# Altium PCB PCBpower1.PcbDoc
Units mil, origin at the board's own origin, x right, y up, seen from the top; angles counter-clockwise.
Board outline 6000 x 4000 mil, 2 copper layers (Top Layer, Bottom Layer); 59 components, 24 nets, 142 pads, 27 vias.
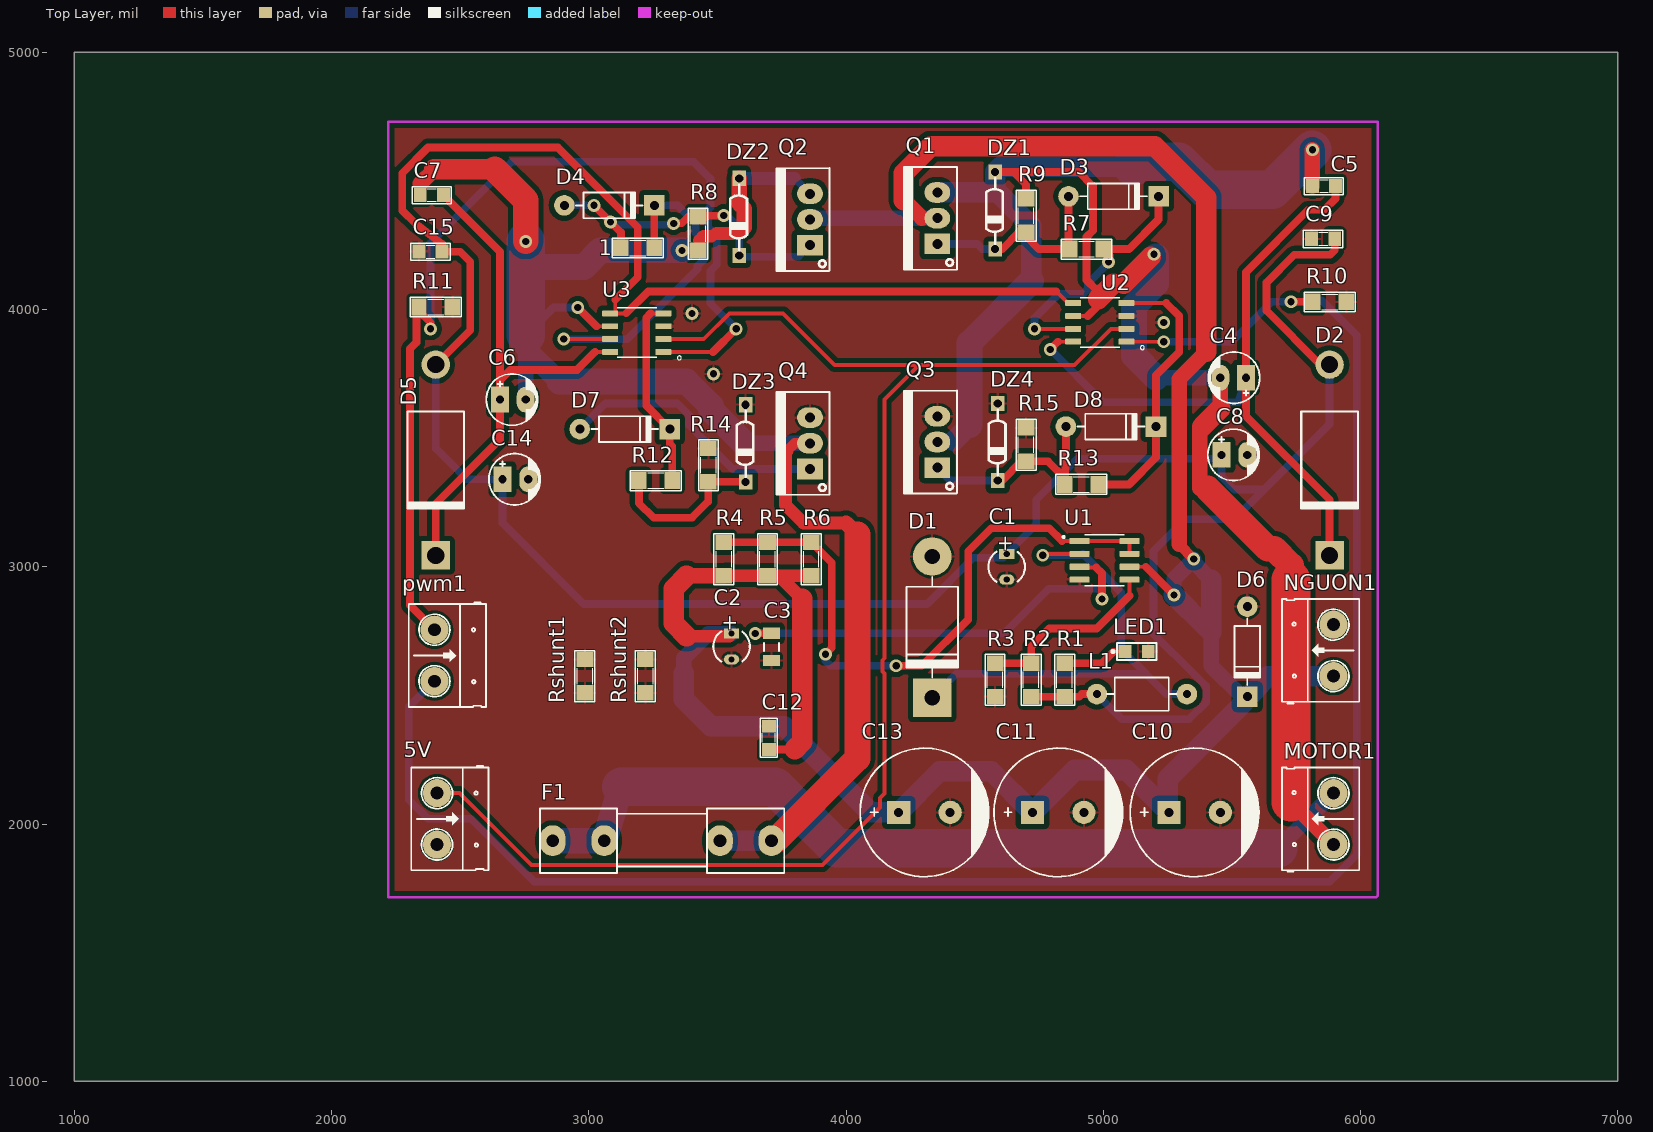
[diagram p0: Top Layer view]
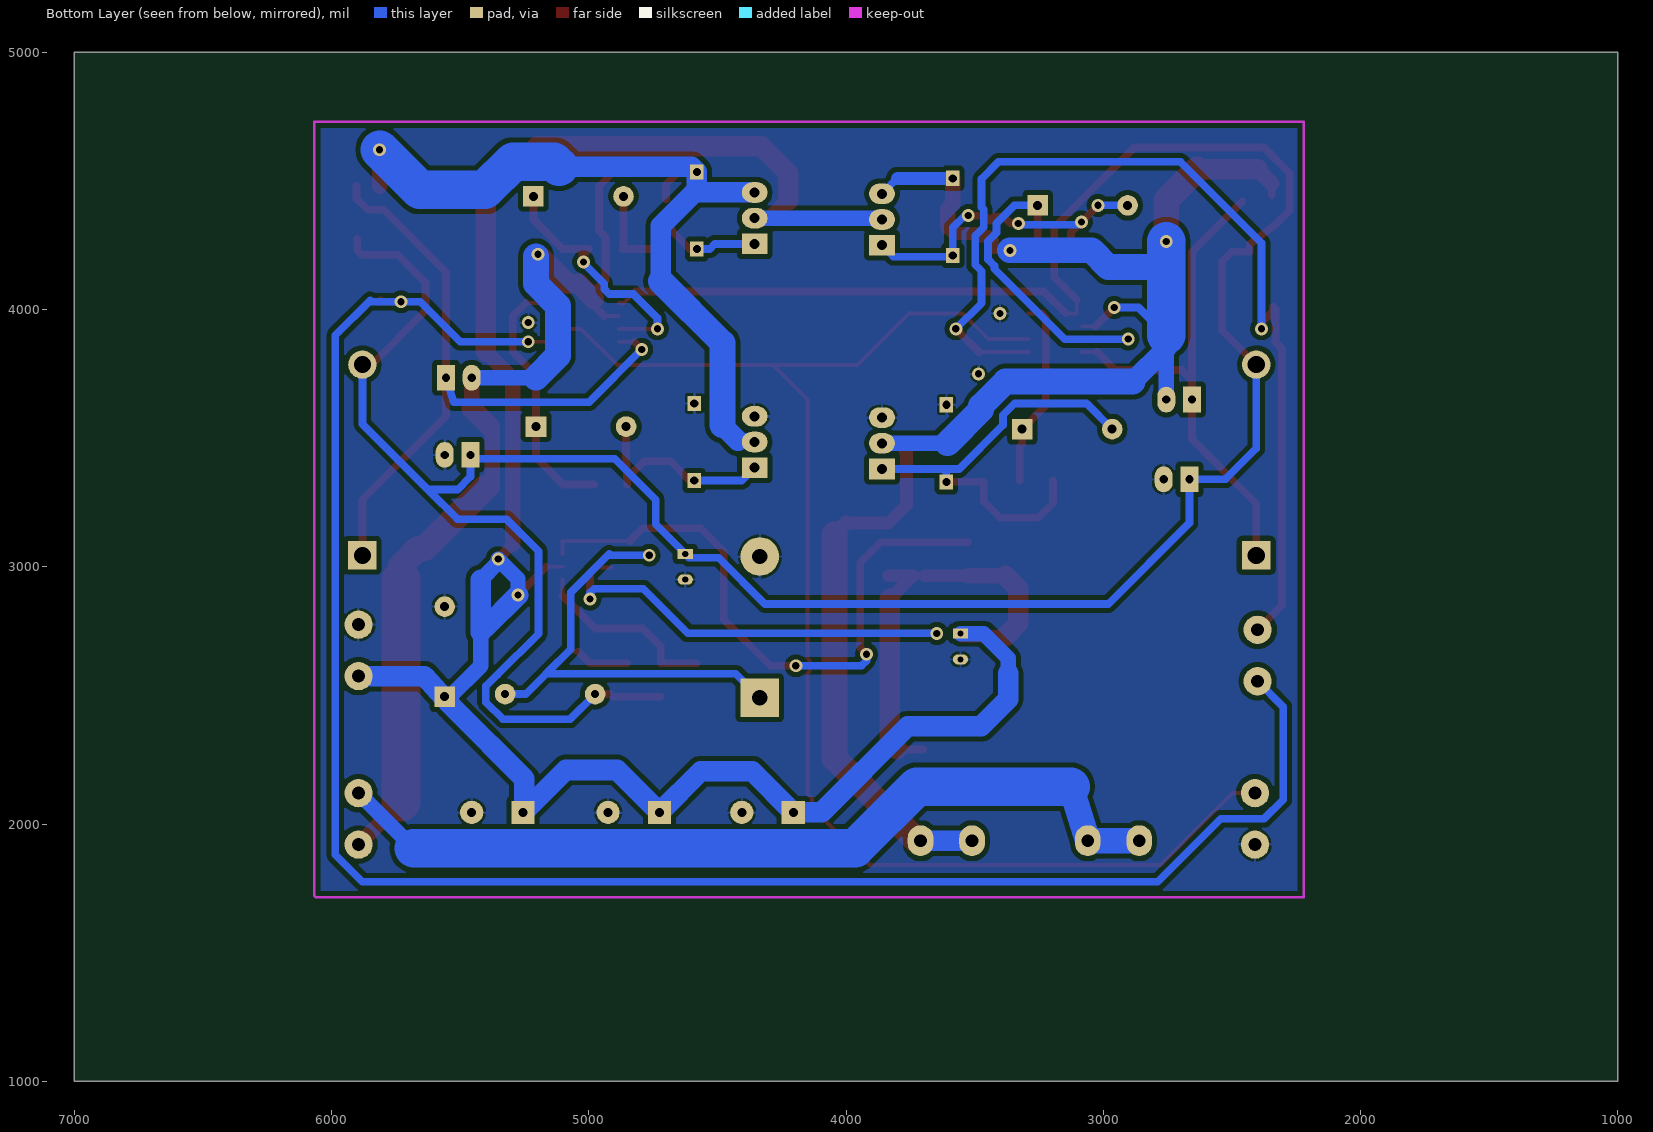
[diagram p1: Bottom Layer view, seen from below]
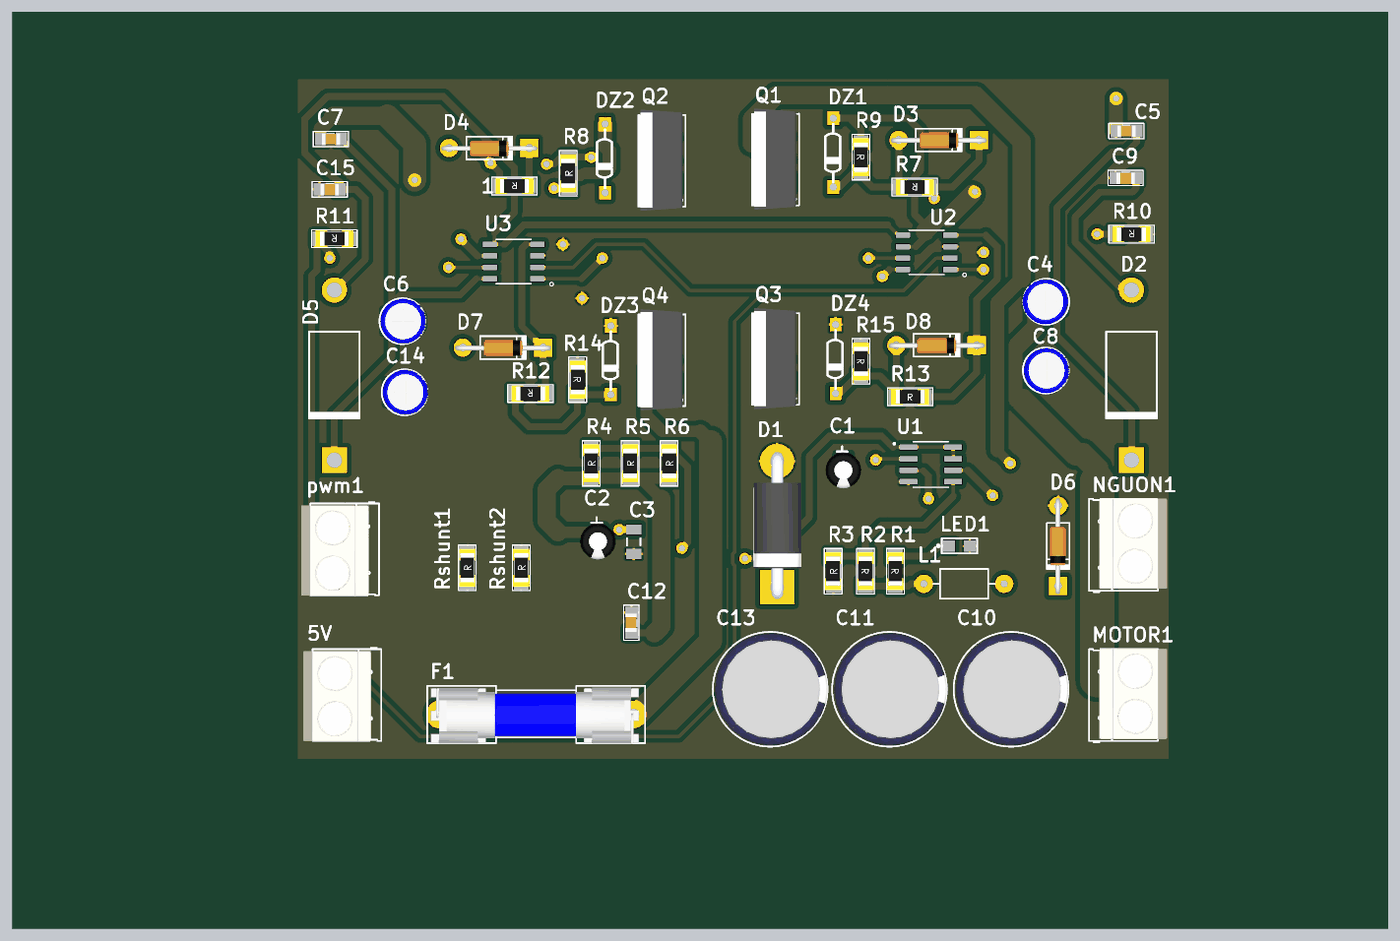
[diagram p2: 3D render of the assembled board from above, using the file's embedded part models]

## Layer stack, top to bottom
Top Solder: solder mask 0.4, Solder Resist, Dk 3.5
Top Layer: signal copper 1.4
Dielectric 1: dielectric 12.6, FR-4, Dk 4.8
Bottom Layer: signal copper 1.4
Bottom Solder: solder mask 0.4, Solder Resist, Dk 3.5

## Board outline
1000,1000 7000,1000 7000,5000 1000,5000

## Design rules (kind name [scope] priority, off if disabled: settings)
Clearance [All] p1: gap=20 ignorepadtopadclearanceinfootprint=FALSE
PolygonConnect [All] p1: connectstyle=Relief reliefconductorwidth=10 reliefentries=4 polygonreliefangle="90 Angle" airgapwidth=10
RoutingVias [All] p1: holewidth=28 width=50 viastyle="Through Hole" minholewidth=28 minwidth=50 maxholewidth=28 maxwidth=50
SilkToSolderMaskClearance [IsText] p1: minsilkscreentomaskgap=9.9 clearancetoexposedcopper=TRUE
SolderMaskExpansion [All] p1: expansion=4
Width [All] p1: maxlimit=200 minlimit=10 preferedwidth=30
29 further rules are at their usual default settings.

## Components (designator, comment, footprint, x,y, rotation, side; value= is the part's Value field where it differs from the comment)
1 "10R" SM-1206 3190,4240 r180 top value="R1/4W - 1K"
5V "Header 2" HED2 2410,2120 r270 top (schematic designator 2)
C1 "470uf" C3MM 4625,3000 r270 top
C2 "100uF" C3MM 3555,2690 r270 top
C3 "470p" C1206 3710,2688.15 r90 top
C4 "10uF" CP1/2 5555,3735 r180 top value=10uF/50V
C5 "104" SM-0805 5858,4480 r0 top value=103
C6 "10uF" CP1/2 2655,3650 r0 top value=10uF/50V
C7 "104" SM-0805 2390,4445 r0 top value=103
C8 "10uF" CP1/2 5460,3435 r0 top value=10uF/50V
C9 "104" SM-0805 5855,4275 r0 top value=103
C10 "Cap Pol3" CP2/5 5255,2045 r0 top value=220uF/35V
C11 "Cap Pol3" CP2/5 4725,2045 r0 top value=220uF/35V
C12 "104" SM-0805 3700,2335 r270 top value=103
C13 "Cap Pol3" CP2/5 4205,2045 r0 top value=220uF/35V
C14 "10uF" CP1/2 2665,3340 r0 top value=10uF/50V
C15 "104" SM-0805 2385,4225 r0 top value=103
D1 "1N5819" D5A 4335,2490 r90 top value=1N5408
D2 "Diode 1N5408" DO-201AD 5880,3415 r270 top
D3 "1N4148" D1A 4865,4440 r180 top value=1N4007
D4 "1N4148" D1A 2905,4405 r180 top value=1N4007
D5 "Diode 1N5408" DO-201AD 2405,3415 r270 top
D6 "1N4007" D1A 5560,2845 r90 top
D7 "1N4148" D1A 2965,3535 r180 top value=1N4007
D8 "1N4148" D1A 4855,3545 r180 top value=1N4007
DZ1 "Diode Zener" DIODE/NOM/0.5A 4580,4535 r270 top
DZ2 "Diode Zener" DIODE/NOM/0.5A 3585,4510 r270 top
DZ3 "Diode Zener" DIODE/NOM/0.5A 3610,3630 r270 top
DZ4 "Diode Zener" DIODE/NOM/0.5A 4590,3635 r270 top
F1 "F1A" Fuse 3285,1935 r180 top value=Fuse
L1 "220uH" L/0.4 5325,2505 r180 top value="150 mH"
LED1 "LED3" LED0805 5130,2670 r0 top
MOTOR1 "Header 2" HED2 5895,1920 r90 top
NGUON1 "Header 2" HED2 5895,2575 r90 top
pwm1 "Header 2" HED2 2400,2755 r270 top
Q1 "IRF540N" QTO-220 4355,4255 r90 top value=IRF840
Q2 "IRF540N" QTO-220 3860,4250 r90 top value=IRF840
Q3 "IRF540N" QTO-220 4355,3385 r90 top value=IRF840
Q4 "IRF540N" QTO-220 3860,3380 r90 top value=IRF840
R1 "2k7" SM-1206 4850,2560 r270 top value="R1/4W - 1K"
R2 "10k" SM-1206 4720,2560 r270 top value="R1/4W - 1K"
R3 "1k2" SM-1206 4580,2560 r90 top value="R1/4W - 1K"
R4 "1k" SM-1206 3525,3030 r90 top value="R1/4W - 1K"
R5 "1k" SM-1206 3695,3030 r90 top value="R1/4W - 1K"
R6 "1k" SM-1206 3865,3030 r90 top value="R1/4W - 1K"
R7 "10R" SM-1206 4935,4235 r180 top value="R1/4W - 1K"
R8 "4k7" SM-1206 3425,4295 r90 top value="R1/4W - 1K"
R9 "4k7" SM-1206 4700,4365 r270 top value="R1/4W - 1K"
R10 "10k" SM-1206 5880,4030 r180 top value="R1/4W - 1K"
R11 "10k" SM-1206 2405,4010 r180 top value="R1/4W - 1K"
R12 "10R" SM-1206 3260,3335 r180 top value="R1/4W - 1K"
R13 "10R" SM-1206 4915,3320 r0 top value="R1/4W - 1K"
R14 "4k7" SM-1206 3465,3395 r270 top value="R1/4W - 1K"
R15 "4k7" SM-1206 4700,3475 r270 top value="R1/4W - 1K"
Rshunt1 "0.1" SM-1206 2985,2575 r90 top value="R1/4W - 1K"
Rshunt2 "0.1" SM-1206 3220,2575 r90 top value="R1/4W - 1K"
U1 "MC34063AD" SOIC127P599X175-8N 5005,3025 r0 top
U2 "IR2184" SOIC127P490X600X175-8N 4986.65,3950 r180 top
U3 "IR2184" SOIC127P490X600X175-8N 3186.65,3910 r180 top

## Footprints (in the part's own frame and the unit in brackets; to place one, negate y for a bottom-side part, rotate by r counter-clockwise, add the part's x,y. Pads: shape width x height; smd on the part's side, far side on the other; paste and mask are expansions set on the pad)
C3MM [mm]
  rect 1x1.5 hole 0.6: 1(-1.27,0)
  oval 1x1.5 hole 0.6: 2(1.27,0)
  silkscreen extent -1.5,-1.81 1.5,1.8, body extent -2,-2.03 1.99,1.97, height 7.01
C1206 [mm] "Chip Capacitor, Body 3.2x1.6mm, IPC High Density"
  rect 1.1x1.7 smd: 1(-1.35,0) 2(1.35,0)
  silkscreen extent -0.4,-0.75 0.4,0.75, body extent -1.7,-0.9 1.7,0.9, height 1.3
CP1/2 [mil] "Tu hoa < 22uF/16>50V"
  rect 70x100 hole 32: 1(0,0)
  oval 70x100 hole 32: 2(100,0)
  silkscreen extent -53,-100 147,100, body extent -49,-99 149,99, height 287
CP2/5 [mil] "Tu hoa 1000uF/25V,50V"
  rect 90x90 hole 35: 1(0,0)
  round 90 hole 35: 2(200,0)
  silkscreen extent -150,-250 350,250, body extent -142,-246 350,246, height 984
D1A [mil] "Diode 1A, W 100mil, L 350mil"
  round 80 hole 35: 1(0,0)
  rect 80x80 hole 35: 2(-350,0)
  silkscreen extent -305,-50 -45,50, body extent -386,-33 34,36, height 84
D5A [mil] "Diode 5A, W 200mil, L 550mil"
  round 150 hole 60: 1(550,0)
  rect 150x150 hole 60: 2(0,0)
  silkscreen extent 80,-100 470,100, body extent -52,-106 590,103, height 254
DIODE/NOM/0.5A [mm]
  rect 1.5x1.3 hole 0.8: 1(0,0) 2(7.62,0)
  silkscreen extent 0.64,-0.89 7.11,0.76
DO-201AD [mm] "Diode, Axial; Body 9.5 x 5.6 mm (LxDia. max), Lead Dia. 1.32 mm (max)"
  round 2.8 hole 1.7: 1(-9.42,0)
  rect 2.8x2.8 hole 1.7: 2(9.42,0)
  silkscreen extent -4.8,-2.8 4.9,2.8
Fuse [mil] "De Fuse"
  oval 100x120 hole 50: 1(-425,0) 1(-225,0) 2(225,0) 2(425,0)
  silkscreen extent -475,-125 475,125, body extent -448,-117 459,127, height 378
HED2 [mil] "Header 2, 2 pin, hight 300mil, Pin to Pin 200, Colour Green"
  round 110 hole 50: 1(0,0) 2(200,0)
  silkscreen extent -106,-100 300,200, body extent -92,-140 302,155, height 394
L/0.4 [mil] "Inductor , 2 Pin, L 350mil, W 150 mil"
  round 80 hole 31: 1(0,0) 2(350,0)
  silkscreen extent 40,-65 310,65
LED0805 [mil] "Chip Resistor; Body 2.0 x 1.3 mm (LxW typ)"
  rect 50x50 smd: 1(-45,0) 2(45,0)
  silkscreen extent -97,-33 77,33, body extent -60,-25 60,25, height 47
QTO-220 [mil] "TO-220 - 1-2-3"
  rect 80x100 hole 39: 1(0,0)
  oval 80x100 hole 39: 2(100,0) 3(200,0)
  silkscreen extent -100,-76 300,130, body extent -119,-64 322,121, height 755
SM-0805 [mil] "Compoment SMD 80x50mil"
  rect 50x55 smd: 1(-45,0) 2(45,0)
  silkscreen extent -77,-34 76,33, body extent -40,-27 40,23, height 24
SM-1206 [mil] "Compoment SMD 120x60mil"
  rect 60x65 smd: 1(-65,0) 2(65,0)
  silkscreen extent -99,-38 99,39, body extent -83,-35 83,36, height 25
SOIC127P490X600X175-8N [mm]
  rrect25% 1.58x0.59 smd: 1(-2.625,1.905) 2(-2.625,0.635) 3(-2.625,-0.635) 4(-2.625,-1.905) 5(2.625,-1.905) 6(2.625,-0.635) 7(2.625,0.635) 8(2.625,1.905)
  silkscreen extent -4.41,-2.45 1.95,2.69
SOIC127P599X175-8N [mm]
  rrect25% 1.97x0.6 smd: 1(-2.47,1.905) 2(-2.47,0.635) 3(-2.47,-0.635) 4(-2.47,-1.905) 5(2.47,-1.905) 6(2.47,-0.635) 7(2.47,0.635) 8(2.47,1.905)
  silkscreen extent -4.14,-2.53 1.95,2.53

## Part data
1 R1 R2 R3 R4 R5 R6 R7 R8 R9 R10 R11 R12 R13 R14 R15 Rshunt1 Rshunt2: library part R, "Resistor 1/4W"
5V MOTOR1 NGUON1 pwm1: library part Hed2, "Header 2 (Green)"
C1 C2: library part "Cap Pol 3mm", "Polarized Capacitor (Axial)", LatestRevisionDate=17-Jul-2002, LatestRevisionNote="Re-released for DXP Platform.", PackageReference=POLAR0.8, Published=8-Jun-2000, Publisher="Altium Limited"
C3: library part "Cap SMD 1206"
C4 C6 C8 C14: library part CP1, "Cap P  0,1uF < 22uF , 16 - 50V", Description 1="10 => 220uF/6,3V/10V - 10uF => 100uF/16V", Description 2="0,1uF => 33uF/50V - 10uF => 22uF/63V", Description 3="0,47uF => 10uF/100V"
C5 C7 C9 C12 C15: library part CM, "Cap SMD"
C10 C11 C13: "Polarized Capacitor (Surface Mount)", LatestRevisionDate=17-Jul-2002, LatestRevisionNote="Re-released for DXP Platform.", PackageReference=C0805, Publisher="Altium Limited"
D1: library part D5A, "Diode 5A"
D2 D5: "3 Amp Medium Power Silicon Rectifier Diode", ComponentLink1Description="Manufacturer Link", ComponentLink1URL=http://www.irf.com/, DatasheetVersion=Aug-1984, LatestRevisionDate=17-Jul-2002, LatestRevisionNote="Re-released for DXP Platform.", PackageDescription="Diode, Axial; Body 9.5 x 5.3 mm (LxDia. max), Lead Dia. 1.32 mm (max)", PackageReference=DO-201AD, Published=8-Jun-2000, Publisher="Altium Limited"
D3 D4 D6 D7 D8: library part D1A, "Diode 1A"
DZ1 DZ2 DZ3 DZ4: "Zener Diode", LatestRevisionDate=17-Jul-2002, LatestRevisionNote="Re-released for DXP Platform.", PackageReference=DIODE-0.7, Published=8-Jun-2000, Publisher="Altium Limited"
F1: library part Fuse, "Fuse", Designed by=VanDungEvn
L1: library part L1, "Inductor"
LED1: library part LEDSMD, "LED 3mm"
Q1 Q2 Q3 Q4: library part IRF840, "MOSFET N - CHANNEL 500V - 0.75 - 8A - TO-220"
U1: "Buck, Boost Switching Regulator IC Positive or Negative Adjustable 1.25V 1 Output 1.5A (Switch) 8-SOIC (0.154, 3.90mm Width)", Package="SOIC-8 ON Semiconductor", Availability=Unavailable, DigiKey-Purchase-URL=https://snapeda.com/shop?store=DigiKey&id=653486, MF="ON Semiconductor", Mouser-Purchase-URL=https://snapeda.com/shop?store=Mouser&id=653486, MP=MC34063AD, Price=None, SnapEDA_Link=https://www.snapeda.com/parts/MC34063AD/ON%20Semiconductor/view-part/653486/?ref=snap
U2 U3: "Half-Bridge Driver"

## Via types
v1: diameter 50, hole 28, Top Layer to Bottom Layer, 27 vias

## Nets (pads, with @x,y where several pads share a name; then routed paths per layer and width w, separated by ;. In a path a pad name is that pad's centre, name@x,y a point inside that pad or via, vN(x,y) a via of type N, cw(c..) or ccw(c..) an arc to the next point about the centre after c; other vN are vias at no path point)
5V: 5V.1 U2.2 U3.2 | length 5703
  Top Layer w15: 5V.1 2497.48,2120 2777.48,1840 3908,1840 4132.5,2064.5 4132.5,2101.39 4150,2118.89 4150,2585.75 4142.5,2593.25 4142.5,2636.75 4150,2644.25 4150,3650 4284,3784 ; U3.2 3447,3885 3547,3985 3755,3985 3956,3784 4284,3784 ; U2.2 5030,3925 4889,3784 4284,3784
24V: C2.1 C10.1 C11.1 C12.2 C13.1 D6.2 NGUON1.1 Q1.2 Q2.2 R4.1 R5.1 R6.1 U1.6 | length 10102.9
  Top Layer w15: U1.6 5165,3000
  Top Layer w30: R5.1 3740,2965 ; C12.2 3800,2290 ; 5165,3000 v1(5275,2890)
  Top Layer w40: 4295,4355 Q1.2 ; 5295,3087 v1(5352,3030)
  Top Layer w50: 3380,2730 C2.1@3545,2730 ; R4.1 R5.1 ; 3830,2875 3740,2965 R6.1@3835,2965
  Top Layer w60: 3380,2965 R4.1 ; 4225,4425 4295,4355 ; 5295,3087 5295,3730 5401,3836
  Top Layer w80: 3380,2730 3330,2780 3330,2915 3380,2965 ; 3800,2290 3830,2320 3830,2875 ; 4225,4425 4225,4530 4330,4635 5200,4635 5401,4434 5401,3836
  Bottom Layer w30: Q2.2 Q2.2@3865,4355 ; C10.1@5250,2050 C10.1 ; 5525,2450 D6.2@5534.77,2460.62 ; D6.2@5540,2495 D6.2
  Bottom Layer w60: 3370,2585 3370,2645 3465,2740 C2.1 ; Q2.2@3865,4355 Q1.2 ; v1(5275,2890) 5275,2953 v1(5352,3030) ; v1@5352,3017 5420,2949 ; 5420,2745 5420,2615 D6.2@5540,2495
  Bottom Layer w80: 3370,2585 3370,2485 3475,2380 3760,2380 4095,2045 C13.1 4365,2205 4565,2205 C11.1 4890,2210 5090,2210 5250,2050 5250,2175 5525,2450 ; v1(5275,2890) 5400,2765 ; 5420,2745 5420,2949 ; D6.2@5534.77,2460.62 5563.47,2491.81 5640,2575 NGUON1.1
+12V: C1.1 C8.1 C9.2 C14.1 C15.2 D2.1 D5.1 L1.2 R1.2 R2.2 U2.5 U3.5 | length 11888.9
  Top Layer w15: 3103,4038 3103,3985 3146,3985 ; 4817.6,4070 4862.6,4025 U2.5
  Top Layer w30: D5.1 2539,3919.87 2539,4186 2500,4225 C15.2 2430,4255 2325,4335 2275,4385 2275,4530 2375,4630 2880,4630 3190,4320 3190,4125 3103,4038 ; 3146,3985 3231,4070 4817.6,4070 ; R2.2 R1.2 4907,2495 4917,2505 L1.2 ; D2.1 5844.13,3785.87 5635,3995 5635,4105 5742.5,4212.5 5882.5,4212.5 5900,4230 C9.2
  Bottom Layer w30: D5.1 2405,3460 2525,3340 C14.1 2665,3170 2980,2855 4315,2855 4495,3035 4610,3035 C1.1 4740,3165 4740,3261 4899,3420 C8.1@5460,3420 ; L1.2 5073,2407 5333.07,2407 5400,2473.93 5400,2536.07 5356.07,2580 5355,2580 5195,2740 5195,3060 5320,3185 5510,3185 5625,3300 ; C8.1 C8.1@5460,3420 ; D2.1 5880,3555 5625,3300 ; C8.1@5460,3420 5460,3350 5510,3300 5625,3300
GND: 5V.2 C1.2 C2.2 C3.1 C8.2 C9.1 C10.2 C11.2 C12.1 C13.2 C14.2 C15.1 D1.1 D6.1 DZ3.1 DZ4.1 LED1.2 NGUON1.2 Q3.3 Q4.3 R3.1 R10.1 R11.1 R14.1 R15.1 Rshunt1.1 Rshunt1.2 Rshunt2.1 Rshunt2.2 U1.4 U2.3 U3.3 | length 10
  Top Layer w30: C10.2 C10.2@5465,2045
  other v1: 3485,3750 5235,3950 3401,3985
M+: C4.2 C5.1 DZ1.1 MOTOR1.1 Q1.3 Q3.2 R9.1 U2.6 | length 7332.7
  Top Layer w15: U2.6 4940,3975
  Top Layer w30: DZ1.1 4650,4535 ; R9.1 4700,4485 4650,4535 ; 4940,3975 4980,4015 4980,4040 ; 4975,4075 4935,4115 4935,4282 4960,4307 4960,4480 4905,4535 4650,4535 ; v1@5185,4205 5195,4215 v1(5197.5,4215) ; 5375,3305 5405,3305 ; 5730,2950 5730,3005
  Top Layer w60: 5040,4100 5080,4100 ; 5375,3305 5375,3535 5385,3545 ; 5455,3615 C4.2 ; 5730,2085 MOTOR1.1 ; C5.1 v1(5813,4621)
  Top Layer w80: 4980,4040 4980,4040.87 5039.13,4100 5040,4100 ; 5080,4100 v1@5185,4205 ; 5385,3545 5455,3615
  Top Layer w100: 5405,3305 5640,3070 5665,3070 5730,3005
  Top Layer w150: 5730,2085 5730,2950
  Bottom Layer w30: Q3.2 4355,3505 Q3.2@4370,3490 ; v1(5197.5,4215) v1@5205,4207.5
  Bottom Layer w60: Q3.2@4370,3490 4420,3490 ; 5205,3735 C4.2
  Bottom Layer w80: Q1.3 4580,4456 ; 4420,3490 4480,3550 ; 4720,4110 4720,4325 4580,4465 DZ1.1 4600,4555 5115,4555
  Bottom Layer w100: 4480,3550 4480,3870 4720,4110 ; 5205,3735 5120,3820 5120,4015 5205,4100 v1@5205,4207.5
  Bottom Layer w150: 5115,4555 5115.65,4555 5135.65,4575 5294.35,4575 5404.35,4465 5657,4465 v1(5813,4621)
M-: F1.2 MOTOR1.2 | length 3377.4
  Bottom Layer w60: 5680,1905 MOTOR1.2
  Bottom Layer w100: F1.2@2860,1935 3060,1935 3126.32,2145
  Bottom Layer w150: 3126.32,2145 3725,2145 3965,1905 5680,1905
Net1_1: 1.1 D4.2 U3.7 | length 1368.3
  Top Layer w15: v1(2903,3885) U3.7
  Top Layer w30: 1.1 D4.2
  Bottom Layer w30: v1(2903,3885) 3150,3885 3423,4158 3423,4169.79 3448,4194.79 3448,4265.21 3415,4298.21 3415,4334.85 3344.85,4405 D4.2
Net1_2: 1.2 D4.1 DZ2.2 Q2.1 R8.2 | length 1282.4
  Top Layer w30: v1(3020,4405) v1(3085,4340) 3125,4300 1.2 ; v1(3330,4335) 3361,4335 3386,4360 R8.2 3440,4345 3460,4365 v1(3525,4365)
  Bottom Layer w30: D4.1 v1(3020,4405) ; v1(3085,4340) 3085,4338 3093,4330 3325,4330 v1(3330,4335) ; v1(3525,4365) 3539,4365 3585,4319 DZ2.2 3585,4205 3815,4205 Q2.1
NetC3_2: C3.2 U1.3 | length 1706.9
  Top Layer w15: U1.3@4910.94,2996.81 4973.19,2996.81
  Top Layer w30: v1(3647,2741) 3647.3,2741.3 C3.2 ; 4973.19,2996.81 4995,2975 v1(4995,2875)
  Bottom Layer w30: v1(3647,2741) 4614.85,2741 4788.85,2915 4979,2915 4995,2899 v1(4995,2875)
NetC4_1: C4.1 C5.2 D2.2 U2.8 | length 2768.3
  Top Layer w15: 4823.92,3875 U2.8
  Top Layer w30: v1(4793.96,3845.04) 4823.92,3875 ; D2.2 5880,3260 5555,3585 C4.1 5555,4145 5797.5,4387.5 5859.5,4387.5 5903,4431 C5.2
  Bottom Layer w30: v1(4793.96,3845.04) 4999,3640 5525,3640 C4.1
NetC6_1: C6.1 C7.2 D5.2 U3.8 | length 2034.1
  Top Layer w15: 3023.92,3835 U3.8
  Top Layer w30: D5.2 2405,3245 2655,3495 C6.1 2655,3725 ; 2460,4420 2655,4225 2655,3725 ; 3023.92,3835 2953.92,3765 2695,3765 2655,3725
NetC6_2: C6.2 C7.1 DZ2.1 F1.1 Q2.3 Q4.2 R8.1 U3.6 | length 6573.5
  Top Layer w15: 3030,3935 U3.6
  Top Layer w30: C7.1 2345,4490 ; v1(2957,4008) 3030,3935 ; v1(3363,4230) R8.1 3425,4250 3430,4255 3430,4267.79 ; 3585,4300 3604,4319 ; F1.1@3710,1935 F1.1@3725,1935
  Top Layer w40: 3770,3450 3800,3480 Q4.2
  Top Layer w50: 3430,4267.79 3447.21,4285 3476.14,4285 ; 3496.01,4295 3580,4295 3585,4300 ; 3770,3450 3765,3445 3765,3240 3835,3170 4000,3170
  Top Layer w60: 2345,4490 2400,4545 ; DZ2.1 3585,4411.07 3604,4392.07 3604,4319 ; 4000,3170 4045,3125
  Top Layer w80: 2400,4545 2635,4545
  Top Layer w100: 2635,4545 2755,4425 v1(2755,4265) ; F1.1@3725,1935 4045,2255 4045,3125
  Bottom Layer w30: 2755,3850 2755,3900 2863,4008 v1(2957,4008) ; 3800,4510 Q2.3
  Bottom Layer w50: DZ2.1 3800,4510
  Bottom Layer w60: C6.2 2755,3850 ; 3605,3480 Q4.2
  Bottom Layer w80: 2755,3850 2885,3720 ; F1.1@3510,1935 F1.1@3710,1935
  Bottom Layer w100: 2755,4130 2790,4165 2980,4165 3045,4230 v1(3363,4230) ; 2885,3720 3379.71,3720 3475,3624.71 3475,3610 3605,3480
  Bottom Layer w150: 2755,3900 2755,4130 v1(2755,4265)
NetD1_2: D1.2 L1.1 U1.2 | length 1924.5
  Top Layer w15: v1@4770,3050 U1.2
  Top Layer w30: v1(4765,3045) v1@4770,3050
  Bottom Layer w30: D1.2 4429,2584 5159,2584 5162.5,2587.5 5070,2680 5070,2900 4920,3050 4915,3045 v1(4765,3045) ; 5166,2584 5245,2505 L1.1
NetD3_1: D3.1 DZ1.2 Q1.1 R7.2 R9.2 | length 771.4
  Top Layer w30: DZ1.2 4607,4235 4672,4300 R9.2@4673.48,4306.27 ; R9.2 4700,4285 4750,4235 R7.2 4865,4240 D3.1
  Bottom Layer w30: Q1.1 4510,4255 4530,4235 DZ1.2
NetD3_2: D3.2 R7.1 U2.7 | length 999.3
  Top Layer w15: v1(4733,3925) U2.7
  Top Layer w30: v1(5020,4185) 5020,4205 5025,4210 R7.1 5100,4235 5215,4350 D3.2
  Bottom Layer w30: v1(4733,3925) 4733,3966.93 4826.07,4060 4920,4060 4940,4080 4940,4099.85 5020,4179.85 v1(5020,4185)
NetD7_1: D7.1 DZ3.2 Q4.1 R12.2 R14.2 | length 1744.1
  Top Layer w30: R12.2 3195,3247.5 3252.5,3190 3401,3190 3465,3254 R14.2 DZ3.2
  Bottom Layer w30: D7.1 3065,3635 3344.5,3635 3390,3589.5 3390,3549.79 3559.79,3380 3610,3380 ; DZ3.2 3610,3380 ; Q4.1 3610,3380
NetD7_2: D7.2 R12.1 U3.4 | length 749.3
  Top Layer w15: 3240,3985 U3.4
  Top Layer w30: 3240,3985 3223,3968 3223,3627 D7.2 3315,3477.5 3325,3467.5 R12.1
NetD8_1: D8.1 DZ4.2 Q3.1 R13.1 R15.2 | length 823.8
  Top Layer w30: DZ4.2 4607,3335 4682,3410 R15.2 4785,3410 4850,3345 R13.1 4855,3437 D8.1
  Bottom Layer w30: Q3.1 4405,3335 DZ4.2
NetD8_2: D8.2 R13.2 U2.4 | length 1081.4
  Top Layer w15: U2.4 5244.85,4025
  Top Layer w30: R13.2 5100,3320 5205,3425 D8.2 5205,3745 5295,3835 5295,3974.85 5244.85,4025
NetLED1_1: LED1.1 R1.1 | length 253.6
  Top Layer w15: 5040,2670 LED1.1
  Top Layer w30: R1.1 4995,2625 5040,2670
NetR2_1: R2.1 R3.2 U1.5 | length 731.7
  Top Layer w15: 5102.24,2887.24 U1.5
  Top Layer w30: R3.2 R2.1 4720,2690 4790,2760 4975,2760 5102.24,2887.24
NetR4_2: R4.2 R5.2 R6.2 U1.1 U1.7 U1.8 | length 2481.6
  Top Layer w15: 4840,3100 U1.1 U1.8 U1.7
  Top Layer w30: R4.2 R5.2 R6.2 3945,3015 3945,2685 v1(3920,2660) ; v1(4195,2615) 4295,2615 4475,2795 4475,3060 4565,3150 4790,3150 4840,3100
  Bottom Layer w30: v1(3920,2660) 3920,2635 3940,2615 v1(4195,2615)
pwm1: pwm1.1 R11.2 U3.1 | length 3964.3
  Top Layer w15: U3.1 3483,3835
  Top Layer w30: v1(2385,3925) 2385,3948 2340,3993 R11.2 2330,4000 2330,3872 2305,3847 2305,2850 pwm1.1 ; 3483,3835 v1(3573,3925)
  Bottom Layer w30: v1(2385,3925) 2385,4259 2700,4574 3407,4574 3473,4508 3473,4397.85 3465,4389.85 3465,4320.15 3498,4287.15 3498,4174.08 3473,4149.08 3473,4025 v1(3573,3925)
pwm2: pwm1.2 R10.2 U2.1 | length 7488.8
  Top Layer w15: U2.1 v1(5235,3875)
  Top Layer w30: v1(5730,4030) 5805,4030 5810,4035 R10.2
  Bottom Layer w30: pwm1.2 2300,2455 2300,2095 2375,2020 2543,2020 2788,1775 5880,1775 5985,1880 5985,3900 5850,4035 5845,4030 v1(5730,4030) 5655,4030 5500,3875 v1(5235,3875)

## Polygon pours and split planes (outlines as drawn)
GND on Top Layer "Bottom Layer-No Net" (solid, pour order 18): 2220,4730 6052.5,4730 6067.5,4715 6067.5,1735 2230,1735 2220,1725
GND on Bottom Layer "Bottom Layer-No Net" (solid, pour order 20): 2220,4730 6047.5,4730 6067.5,4710 6060,4702.5 6060,1715 2240,1715 2220,1735

## Keep-outs
Keep-Out Layer:
  lines w10: 2220,1715 6060,1715 6067.5,1722.5 6067.5,4730 5990,4730 2225,4730 2220,4730 2220,4725 2220,1725 2220,1715

## Text inside footprints (layer, text, board x,y; h text height)
C1: Top Overlay "+" at 4595,3125 h60 r270
C2: Top Overlay "+" at 3525,2815 h60 r270